# Altium PCB Main.PcbDoc
Units mm, origin at the board's own origin, x right, y up, seen from the top; angles counter-clockwise.
Board outline 52.2 x 24.13 mm, 2 copper layers (Top Layer, Bottom Layer); 22 components, 41 nets, 134 pads, 21 vias.
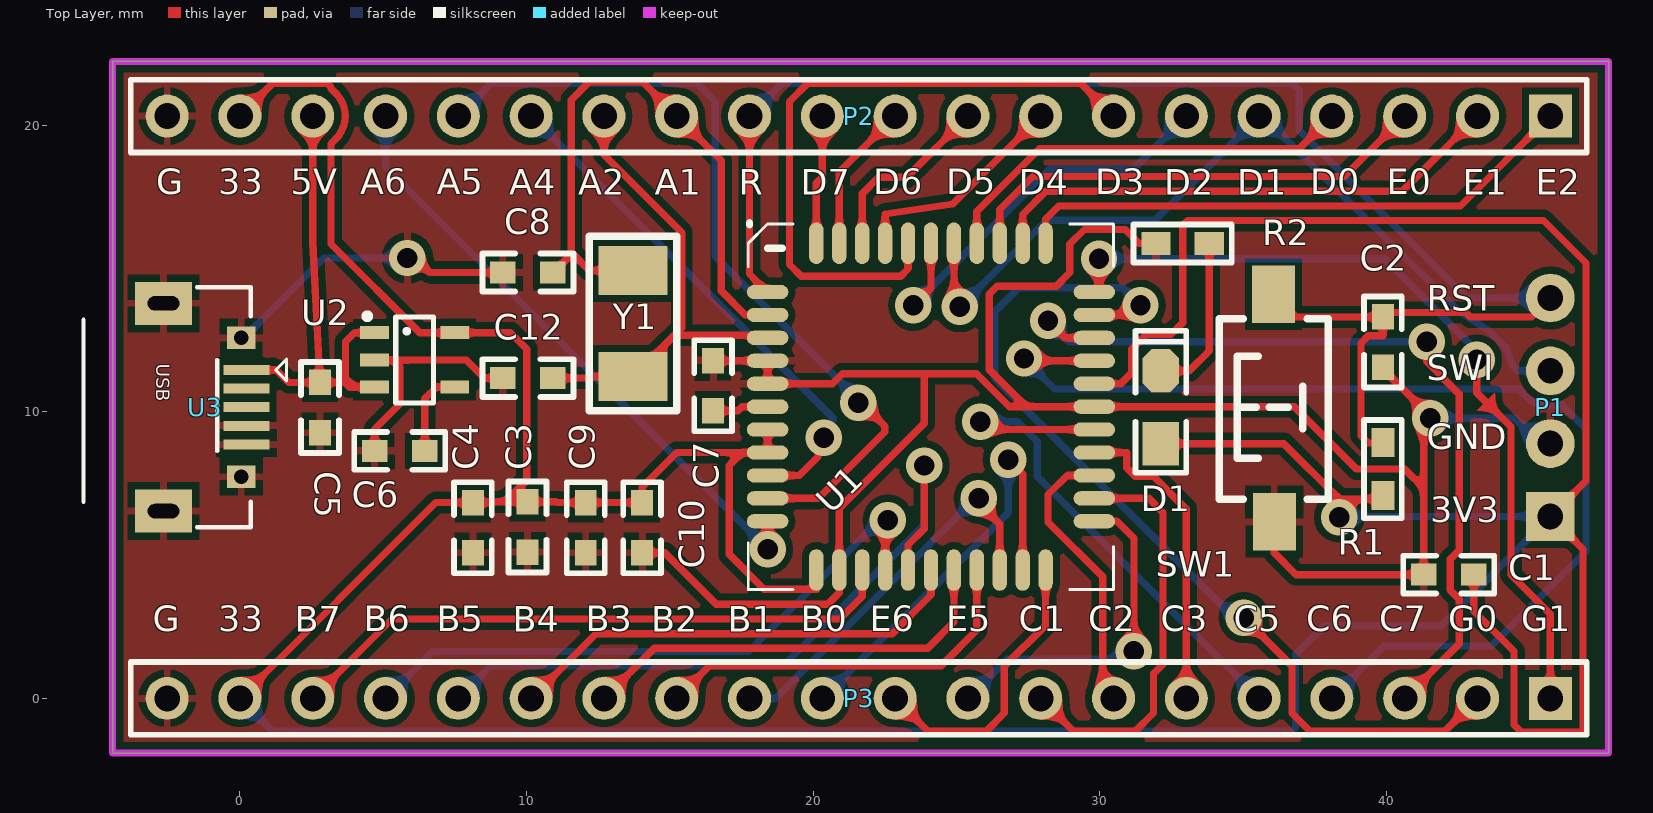
[diagram p0: Top Layer view]
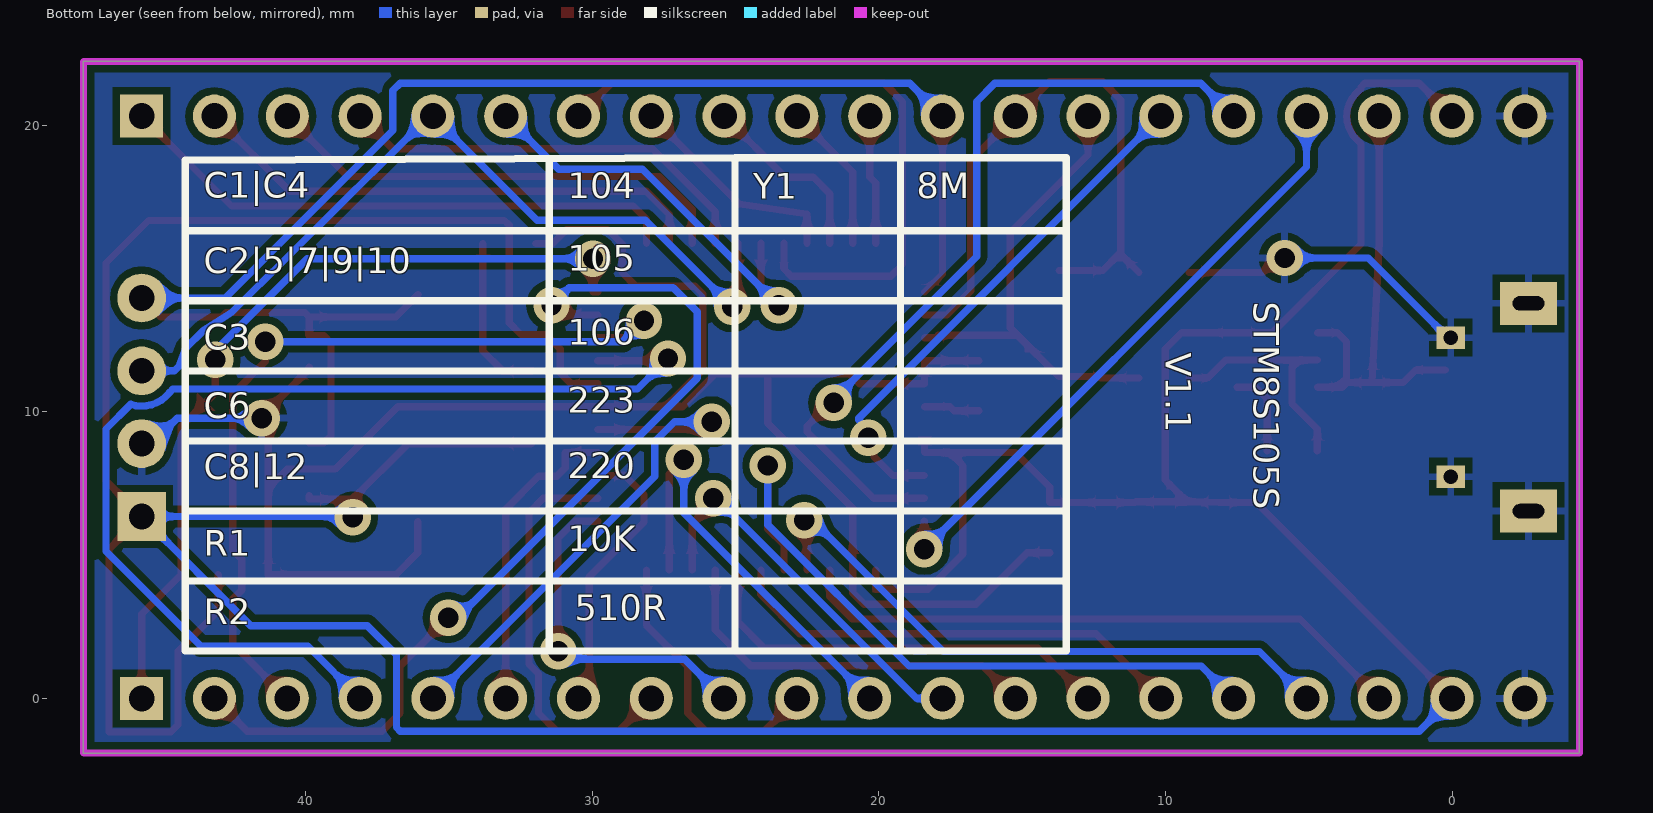
[diagram p1: Bottom Layer view, seen from below]

## Layer stack, top to bottom
Top Solder: solder mask 0.0102, Solder Resist, Dk 3.5
Top Layer: signal copper 0.0356
Dielectric 1: dielectric 0.32, FR-4, Dk 4.8
Bottom Layer: signal copper 0.0356
Bottom Solder: solder mask 0.0102, Solder Resist, Dk 3.5

## Board outline
-4.445,-1.905 -4.445,22.225 47.752,22.225 47.752,-1.905

## Design rules (kind name [scope] priority, off if disabled: settings)
Clearance [All] p1: gap=0.254 ignorepadtopadclearanceinfootprint=FALSE
MinimumSolderMaskSliver [All] p1: minsoldermaskwidth=0.06
PolygonConnect [All] p1: connectstyle=Relief reliefconductorwidth=0.254 reliefentries=4 polygonreliefangle="90 Angle" airgapwidth=0.254
RoutingVias [All] p1: holewidth=0.711 width=1.27 viastyle="Through Hole" minholewidth=0.711 minwidth=1.27 maxholewidth=0.711 maxwidth=1.27
SilkToSilkClearance [All] p1: silktosilkclearance=0.2
SilkToSolderMaskClearance [IsPad] p1: minsilkscreentomaskgap=0.09 clearancetoexposedcopper=TRUE
SolderMaskExpansion [All] p1: expansion=0.102 istentingtop=FALSE
Width [All] p1: maxlimit=0.254 minlimit=0.254 preferedwidth=0.254
27 further rules are at their usual default settings.

## Components (designator, comment, footprint, x,y, rotation, side; value= is the part's Value field where it differs from the comment)
C1 "104,0603" "C 0603" 42.164,4.318 r180 top value=104
C2 "105,0603" "C 0603" 39.878,12.446 r90 top value=104
C3 "106,0603" "C 0603" 10.033,5.969 r270 top value=104
C4 "104,0603" "C 0603" 8.128,5.969 r90 top value=104
C5 "105,0603" "C 0603" 2.794,10.16 r90 top value=104
C6 "223,0603" "C 0603" 5.588,8.636 r0 top value=104
C7 "105,0603" "C 0603" 16.51,10.922 r90 top value=104
C8 "220,0603" "C 0603" 10.033,14.859 r180 top value=104
C9 "105,0603" "C 0603" 12.065,5.969 r90 top value=104
C10 "105,0603" "C 0603" 14.034,5.969 r90 top value=104
C12 "220,0603" "C 0603" 10.033,11.176 r180 top value=104
D1 "LED" "LED 0805G" 32.131,10.16 r90 top
P1 "SWD" HDR-1X4_H 45.72,10.16 r90 top
P2 "Header 20" HDR1X20 45.72,20.32 r180 top
P3 "Header 20" HDR1X20 45.72,0 r180 top
R1 "10K,0603" "R 0603" 39.878,8.001 r270 top
R2 "510R,0603" "R 0603" 32.893,15.875 r180 top
SW1 "SW-PB_V" "TSW SMD-3*6*2.5" 36.068,10.16 r90 top
U1 "STM8S105S" LQFP44 24.13,10.16 r0 top
U2 "RT9193" SOT23-5L 6.096,11.811 r270 top
U3 "USB-mrico" USB-micro_B -2.667,10.16 r270 top
Y1 "8M" XTAL-5032 13.716,13.081 r90 top

## Footprints (in the part's own frame and the unit in brackets; to place one, negate y for a bottom-side part, rotate by r counter-clockwise, add the part's x,y. Pads: shape width x height; smd on the part's side, far side on the other; paste and mask are expansions set on the pad)
"C 0603" [mil] "无极性贴片电容"
  rect 35x30 smd: 1(-35,0) 2(34,0)
  silkscreen extent -63,-26 62,26, body extent -31,-16 31,16, height 32
HDR1X20 [mm] "Connector; Header; 20 Position"
  rect 1.5x1.5 hole 0.9: 1(0,0)
  round 1.5 hole 0.9: 2(2.54,0) 3(5.08,0) 4(7.62,0) 5(10.16,0) 6(12.7,0) 7(15.24,0) 8(17.78,0) 9(20.32,0) 10(22.86,0) 11(25.4,0) 12(27.94,0) 13(30.48,0) 14(33.02,0) 15(35.56,0) 16(38.1,0) 17(40.64,0) 18(43.18,0) 19(45.72,0) 20(48.26,0)
  silkscreen extent -1.27,-1.27 49.53,1.27
HDR-1X4_H [mm] "弯脚排针，4脚"
  rect 1.7x1.7 hole 0.9: 1(-3.81,0)
  round 1.7 hole 0.9: 2(-1.27,0) 3(1.27,0) 4(3.81,0)
  body extent -5.08,-7.77 5.08,1.27, height 4.85
"LED 0805G" [mil] "绿色0805LED"
  rect 60x50 smd: 1(-50,0)
  oct 60x50 smd: 2(50,0)
  silkscreen extent -90,-35 105,35, body extent -39,-25 39,25, height 32
LQFP44 [mm]
  oval 1.45x0.5 smd: 1(-5.72,4.02) 2(-5.72,3.22) 3(-5.72,2.42) 4(-5.72,1.62) 5(-5.72,0.82) 6(-5.72,0.02) 7(-5.72,-0.78) 8(-5.72,-1.58) 9(-5.72,-2.38) 10(-5.72,-3.18) 11(-5.72,-3.98) 23(5.68,-3.98) 24(5.68,-3.18) 25(5.68,-2.38) 26(5.68,-1.58) 27(5.68,-0.78) 28(5.68,0.02) 29(5.68,0.82) 30(5.68,1.62) 31(5.68,2.42) 32(5.68,3.22) 33(5.68,4.02)
  oval 0.5x1.45 smd: 12(-4.02,-5.68) 13(-3.22,-5.68) 14(-2.42,-5.68) 15(-1.62,-5.68) 16(-0.82,-5.68) 17(-0.02,-5.68) 18(0.78,-5.68) 19(1.58,-5.68) 20(2.38,-5.68) 21(3.18,-5.68) 22(3.98,-5.68) 34(3.98,5.72) 35(3.18,5.72) 36(2.38,5.72) 37(1.58,5.72) 38(0.78,5.72) 39(-0.02,5.72) 40(-0.82,5.72) 41(-1.62,5.72) 42(-2.42,5.72) 43(-3.22,5.72) 44(-4.02,5.72)
  silkscreen extent -6.4,-6.35 6.36,6.43
"R 0603" [mil] "1/10W贴片电阻"
  rect 40x31.5 smd: 1(-36.5,0) 2(36.5,0)
  silkscreen extent -68,-26 68,26, body extent -31,-16 31,16, height 16
SOT23-5L [mm] "3x1.6x1.1mm(长宽高)"
  rect 0.45x1 smd: 1(-0.95,-1.4) 2(0,-1.4) 3(0.95,-1.4) 4(0.95,1.4) 5(-0.95,1.4)
  silkscreen extent -1.6,-1.73 1.5,0.66, body extent -1.5,-1.4 1.5,1.4, height 1.15
"TSW SMD-3*6*2.5" [mm] "3*6*2.5mm"
  rect 2x1.5 smd: 1(-3.996,-0.02) 2(3.937,0)
  silkscreen extent -3.21,-1.9 3.09,1.9, body extent -4,-1.88 4,1.62, height 2.59
USB-micro_B [mm] "micro型USB ，5.7*7.8*2.5mm"
  rect 0.35x1.6 smd: 1(-1.3,2.9) 2(-0.65,2.9) 3(0,2.9) 4(0.65,2.9) 5(1.3,2.9)
  rect 1.5x2 hole 0.5 slot 1.1 at 90 deg: 5(-3.625,0) 5(3.625,0)
  rect 0.8x1 hole 0.5: 5(-2.425,2.71) 5(2.425,2.71)
  silkscreen extent -4.19,-2.79 4.19,4.3, body extent -4,-2.71 4,2.89, height 2.8
XTAL-5032 [mm]
  rect 1.7x2.4 smd: 1(-1.85,0) 2(1.85,0)
  silkscreen extent -3.05,-1.52 3.05,1.52

## Part data
C1 C2 C3 C4 C5 C6 C7 C8 C9 C10 C12: library part Cap, "Capacitor", LatestRevisionDate=17-Jul-2002, LatestRevisionNote="Re-released for DXP Platform.", Published=8-Jun-2000, Publisher="Altium Limited"
P1: library part "Header 4", "Header, 4-Pin", LatestRevisionDate=17-Jul-2002, LatestRevisionNote="Re-released for DXP Platform.", Publisher="Altium Limited"
P2 P3: "Header, 20-Pin", LatestRevisionDate=17-Jul-2002, LatestRevisionNote="Re-released for DXP Platform.", Publisher="Altium Limited"
R1 R2: library part Res2, "Resistor", LatestRevisionDate=17-Jul-2002, LatestRevisionNote="Re-released for DXP Platform.", Published=8-Jun-2000, Publisher="Altium Limited"
SW1: "SWITCH"
U1: library part STM8S105S4
U2: library part RT9193X_5P, ICA_MFR_NAME=RICHTEK, ICA_PARTNUM=$$2191094$$RT9193-15CU5, Part Number=TMP-13
U3: library part usb-STM
Y1: library part XTAL, "Crystal Oscillator", LatestRevisionDate=17-Jul-2002, LatestRevisionNote="Re-released for DXP Platform.", Published=8-Jun-2000, Publisher="Altium Limited"

## Via types
v1: diameter 1.27, hole 0.711, Top Layer to Bottom Layer, 21 vias

## Nets (pads, with @x,y where several pads share a name; then routed paths per layer and width w, separated by ;. In a path a pad name is that pad's centre, name@x,y a point inside that pad or via, vN(x,y) a via of type N, cw(c..) or ccw(c..) an arc to the next point about the centre after c; other vN are vias at no path point)
5V: C5.2 P2.18 U2.1 U2.3 U3.1 | length 16.9
  Top Layer w0.254: U3.1 1.27,11.46 1.706,11.024 C5.2 ; P2.18 2.54,15.926 C5.2 ; U2.3 3.998,10.861 ; U2.1 3.998,12.761 3.683,12.446 3.683,11.176 3.998,10.861 ; C5.2 3.658,11.024 3.82,10.861 3.998,10.861
GND: C1.2 C2.1 C3.2 C4.1 C5.1 C6.1 C7.2 C8.2 C9.1 C10.1 C12.2 P1.2 P2.20 P3.20 R2.2 SW1.1 U1.4 U1.5 U1.13 U1.28 U2.2 U3.4 U3.5 | length 93.8
  Top Layer w0.254: U2.2 5.334,11.811 ; C6.1 4.699,9.398 5.588,10.287 5.588,11.557 5.334,11.811 ; v1(5.842,15.367) 6.117,15.367 6.625,14.859 C8.2 ; C12.2 8.534,11.176 7.899,11.811 5.334,11.811 ; C10.1 14.822,5.08 16.615,3.287 20.508,3.287 20.91,3.689 U1.13 20.91,6.639 23.876,9.605 23.876,11.176 ; C7.2 16.516,11.78 U1.4 U1.5 20.676,10.98 21.024,11.328 25.699,11.328 26.848,10.18 27.432,10.18 ; R2.2 31.373,15.875 30.888,16.36 29.464,16.36 28.956,15.852 28.956,14.859 28.48,14.383 26.416,14.383 26.142,14.109 26.142,11.47 27.432,10.18 ; SW1.1 36.088,5.08 36.85,4.318 C1.2 41.3,7.341 ; C2.1 39.878,11.493 41.3,10.071 41.3,7.341 ; 27.432,10.18 U1.28 36.785,10.18 38.964,8.001 40.64,8.001 41.3,7.341
  Bottom Layer w0.254: U3.5@0.043,12.585 0.143,12.585 2.925,15.367 v1(5.842,15.367) ; v1(41.529,9.779) 44.479,9.779 45.368,8.89 P1.2
NetC6_2: C6.2 U2.4 | length 3
  Top Layer w0.254: C6.2 6.452,10.455 6.858,10.861 U2.4
NetC7_1: C7.1 U1.6 | length 2
  Top Layer w0.254: C7.1 17.374,10.033 17.521,10.18 U1.6
NetD1_2: D1.2 R2.1 | length 5.7
  Top Layer w0.254: D1.2 33.126,11.43 33.82,12.124 R2.1
OSCIN/PA1: C8.1 P2.13 U1.2 Y1.2 | length 21.8
  Top Layer w0.254: C8.1 11.593,15.53 ; Y1.2 12.192,14.931 11.593,15.53 ; U1.2 17.633,13.38 16.789,14.224 16.789,18.771 P2.13 14.046,21.514 12.192,21.514 11.557,20.879 11.557,15.566 11.593,15.53
OSCOUT/PA2: C12.1 P2.14 U1.3 Y1.1 | length 19.1
  Top Layer w0.254: C12.1 12.268,11.176 12.323,11.231 Y1.1 ; P2.14 12.7,18.974 15.418,16.256 15.418,12.933 Y1.1 ; U1.3 17.932,12.58 17.932,12.675 15.168,12.675 13.724,11.231 Y1.1
PA4: P2.15 U1.9 | length 18.5
  Top Layer w0.254: U1.9 19.516,7.78 20.169,8.433 20.169,8.906 v1(20.364,9.1)
  Bottom Layer w0.254: P2.15 20.701,9.779 20.701,9.713 20.364,9.375 v1(20.364,9.1)
PA5: P2.16 U1.10 | length 28.8
  Top Layer w0.254: U1.10 20.188,6.98 22.501,9.293 22.501,9.503 21.692,10.312 v1(21.576,10.312)
  Bottom Layer w0.254: P2.16 8.763,21.463 15.951,21.463 16.586,20.828 16.586,15.418 21.576,10.428 v1(21.576,10.312)
PA6: P2.17 U1.11 | length 21.6
  Top Layer w0.254: U1.11 18.415,6.18 v1(18.415,5.207)
  Bottom Layer w0.254: P2.17 5.08,18.542 v1(18.415,5.207)
PB0: P3.11 U1.21 | length 15.1
  Top Layer w0.254: v1(26.802,8.331) 27.31,7.823 U1.21
  Bottom Layer w0.254: P3.11 26.802,6.482 v1(26.802,8.331)
PB1: P3.12 U1.20 | length 13.7
  Top Layer w0.254: v1(25.781,6.985) 25.781,6.807 26.51,6.078 U1.20
  Bottom Layer w0.254: P3.12 18.681,0 25.666,6.985 v1(25.781,6.985)
PB2: P3.13 U1.19 | length 13.6
  Top Layer w0.254: P3.13 16.383,1.143 24.465,1.143 25.71,2.388 U1.19
PB3: P3.14 U1.18 | length 15.1
  Top Layer w0.254: P3.14 14.453,1.753 23.996,1.753 24.91,2.667 U1.18
PB4: P3.15 U1.17 | length 16.3
  Top Layer w0.254: P3.15 12.421,2.261 22.764,2.261 24.11,3.607 U1.17
PB5: P3.16 U1.16 | length 24.7
  Top Layer w0.254: U1.16 23.31,5.352 23.876,5.918 v1(23.876,8.128)
  Bottom Layer w0.254: P3.16 8.751,1.131 18.951,1.131 23.876,6.056 v1(23.876,8.128)
PB6: P3.17 U1.15 | length 22
  Top Layer w0.254: U1.15 22.51,5.735 22.733,5.958 22.606,6.085 v1(22.606,6.223)
  Bottom Layer w0.254: P3.17 6.719,1.639 17.743,1.639 22.327,6.223 v1(22.606,6.223)
PB7: P3.18 U1.14 | length 21.6
  Top Layer w0.254: P3.18 5.309,2.769 20.923,2.769 21.71,3.556 U1.14
PC1: P3.8 U1.24 | length 14.4
  Top Layer w0.254: P3.8 29.083,-1.143 31.242,-1.143 31.877,-0.508 31.877,0.864 32.207,1.194 32.207,6.477 31.704,6.98 U1.24
PC2: P3.7 U1.25 | length 10.2
  Top Layer w0.254: U1.25 28.862,7.78 28.194,7.112 28.194,6.147 30.099,4.242 30.099,0.635 30.48,0.635 P3.7
PC3: P3.6 U1.26 | length 10.9
  Top Layer w0.254: U1.26 30.937,8.58 30.937,8.052 31.242,7.747 31.877,7.747 33.02,6.604 P3.6
PC5: P3.5 U1.27 | length 18.5
  Top Layer w0.254: v1(25.832,9.652) 26.104,9.38 U1.27
  Bottom Layer w0.254: v1(25.832,9.652) 27.127,9.652 27.818,8.961 27.818,7.742 P3.5
PC6: P3.4 U1.30 | length 38.4
  Top Layer w0.254: v1(27.356,11.862) 27.438,11.78 U1.30
  Bottom Layer w0.254: v1(27.356,11.862) 28.348,10.869 28.423,10.795 44.634,10.795 44.718,10.711 44.765,10.654 ccw(c45.72,11.43) 46.103,10.26 46.965,9.398 46.965,5.131 43.663,1.829 39.929,1.829 P3.4
PC7: P3.3 U1.31 | length 29.4
  Top Layer w0.254: v1(28.194,13.183) 28.797,12.58 U1.31 ; P3.3 42.545,1.905 42.545,3.462 42.228,3.779 42.228,4.857 42.545,5.174 42.545,10.617 41.402,11.76 v1(41.402,12.446)
  Bottom Layer w0.254: v1(28.194,13.183) 28.931,12.446 v1(41.402,12.446)
PD0: P2.4 U1.37 | length 14.9
  Top Layer w0.254: U1.37 25.71,16.993 27.894,19.177 36.957,19.177 P2.4
PD2: P2.6 U1.39 | length 14.7
  Top Layer w0.254: v1(23.495,13.716) 24.11,14.331 U1.39
  Bottom Layer w0.254: v1(23.495,13.716) 28.245,18.466 31.166,18.466 P2.6
PD3: P2.7 U1.40 | length 23
  Top Layer w0.254: U1.40 23.31,14.986 23.056,14.732 19.583,14.732 19.177,15.138 19.177,20.828 19.812,21.463 29.337,21.463 P2.7
PD4: P2.8 U1.41 | length 7.7
  Top Layer w0.254: U1.41 22.51,16.899 24.869,17.249 P2.8
PD5: P2.9 U1.42 | length 6.5
  Top Layer w0.254: U1.42 21.71,17.613 22.281,18.184 23.264,18.184 P2.9
PD6: P2.10 U1.43 | length 5.2
  Top Layer w0.254: U1.43 20.91,18.37 P2.10
PD7: P2.11 U1.44 | length 4.5
  Top Layer w0.254: U1.44 20.11,17.983 20.32,18.193 P2.11
PE0: P2.3 U1.36 | length 16.7
  Top Layer w0.254: U1.36 26.51,17.061 27.661,18.212 38.532,18.212 P2.3
PE1: P2.2 U1.35 | length 18.3
  Top Layer w0.254: U1.35 27.31,16.884 28.117,17.691 40.551,17.691 P2.2
PE2: P2.1 U1.34 | length 19.9
  Top Layer w0.254: U1.34 28.11,16.726 28.567,17.183 42.583,17.183 P2.1
PE5: P3.9 U1.23 | length 12
  Top Layer w0.254: U1.23 30.599,6.18 31.191,5.588 v1(31.191,1.651)
  Bottom Layer w0.254: P3.9 26.772,1.372 30.912,1.372 v1(31.191,1.651)
PE6: P3.10 U1.22 | length 10.1
  Top Layer w0.254: P3.10 24.003,-1.143 26.035,-1.143 26.67,-0.508 26.67,1.118 28.11,2.558 U1.22
PG0: P3.2 U1.32 | length 33.1
  Top Layer w0.254: U1.32 31.084,13.38 v1(31.42,13.716) ; v1(35.027,2.819) 36.703,1.143 36.703,-0.508 37.338,-1.143 42.037,-1.143 P3.2
  Bottom Layer w0.254: v1(31.42,13.716) 30.81,14.326 27.178,14.326 26.34,13.487 26.34,11.176 34.696,2.819 v1(35.027,2.819)
PG1: P3.1 U1.33 | length 29
  Top Layer w0.254: U1.33 29.972,14.18 v1(29.972,15.342) ; v1(43.155,11.811) 43.155,10.668 44.348,9.474 44.348,4.318 45.72,2.946 P3.1
  Bottom Layer w0.254: v1(29.972,15.342) 39.943,15.342 42.979,12.306 43.053,12.232 v1(43.155,11.811)
RESET: C2.2 P1.4 P2.12 R1.1 SW1.2 U1.1 | length 54.7
  Top Layer w0.254: P2.12 17.78,14.81 U1.1 ; SW1.2 36.855,13.31 C2.2 ; R1.1 39.878,8.915 39.37,8.915 39.116,9.169 39.116,12.395 39.37,12.649 39.878,12.649 C2.2 ; P1.4 45.06,13.31 42.926,13.31 42.774,13.462 40.03,13.462 C2.2
  Bottom Layer w0.254: P2.12 18.923,21.463 36.703,21.463 36.957,21.209 36.957,19.812 42.799,13.97 P1.4
SWIM/PD1: P1.3 P2.5 U1.38 | length 29.4
  Top Layer w0.254: U1.38 24.91,13.876 v1(25.121,13.665)
  Bottom Layer w0.254: v1(25.121,13.665) 28.143,16.688 31.928,16.688 P2.5 35.683,20.32 36.73,19.273 42.589,13.462 43.575,12.827 44.171,12.232 44.424,11.579 44.573,11.43 44.678,11.43 P1.3
VCC3V3: C1.1 C3.1 C4.2 C9.2 C10.2 D1.1 P1.1 P2.19 P3.19 R1.2 U1.7 U1.8 U1.12 U1.29 U2.5 | length 170.1
  Top Layer w0.254: P3.19 6.833,6.833 C4.2 9.246,6.858 ; P2.19 1.143,21.463 3.048,21.463 3.175,21.336 3.175,21.276 3.244,21.207 3.253,21.198 cw(c2.54,20.32) 3.446,19.643 3.446,19.627 3.346,19.527 cw(c2.54,20.32) 3.335,19.516 ccw(c3.514,19.335) 3.332,19.513 3.269,19.448 3.175,19.341 3.175,15.86 3.249,15.785 6.274,12.761 U2.5 9.439,12.761 10.008,12.192 10.008,7.62 9.246,6.858 ; 18.41,8.966 U1.8 17.521,8.58 ; U1.12 20.11,3.81 18.288,3.81 17.069,5.029 17.069,8.128 17.521,8.58 ; U1.29 30.734,10.98 31.115,11.361 31.115,12.192 31.623,12.7 32.487,12.7 32.893,13.106 32.893,16.51 33.058,16.675 45.479,16.675 46.965,15.189 46.965,7.595 P1.1 46.863,5.207 46.863,-1.168 44.704,-1.168 44.45,-0.914 44.45,1.651 43.053,3.048 C1.1 ; D1.1 36.424,8.89 38.354,6.96 38.989,6.96 ; v1(38.354,6.325) 38.989,6.96 ; R1.2 39.878,6.96 38.989,6.96 ; 9.246,6.858 C3.1 11.024,6.858 11.049,6.833 C9.2 C10.2 14.034,7.374 15.24,8.58 17.521,8.58
  Bottom Layer w0.254: P3.19 1.143,-1.143 36.703,-1.143 36.83,-1.016 36.83,1.524 37.846,2.54 41.91,2.54 P1.1 38.379,6.35 v1(38.354,6.325)
pads on no net: U3.2 U3.3

## Polygon pours and split planes (outlines as drawn)
GND on Top Layer "GND_L01_P002" (solid, pour order 2): -4.445,-1.905 -4.445,22.225 47.752,22.225 47.752,-1.905
GND on Bottom Layer "GND_L02_P003" (solid, pour order 3): -4.445,-1.905 -4.445,22.225 47.752,22.225 47.752,-1.905

## Keep-outs
Keep-Out Layer:
  the board outline again, w0.254

## Silkscreen, mask and mechanical layers (free items; w line width, h text height)
Top Overlay:
  text "G" at -2.921,17.288 h1.52
  text "33" at -0.762,17.288 h1.52
  text "5V" at 1.778,17.288 h1.52
  text "A6" at 4.191,17.288 h1.52
  text "A5" at 6.858,17.288 h1.52
  text "D6" at 22.098,17.288 h1.52
  text "D5" at 24.638,17.288 h1.52
  text "D3" at 29.845,17.288 h1.52
  text "D0" at 37.338,17.288 h1.52
  text "E0" at 40.005,17.288 h1.52
  text "A4" at 9.398,17.272 h1.52
  text "A2" at 11.811,17.272 h1.52
  text "A1" at 14.478,17.272 h1.52
  text "R" at 17.399,17.272 h1.52
  text "D7" at 19.558,17.272 h1.52
  text "D4" at 27.178,17.272 h1.52
  text "D2" at 32.258,17.272 h1.52
  text "D1" at 34.798,17.272 h1.52
  text "E1" at 42.672,17.272 h1.52
  text "E2" at 45.212,17.272 h1.52
  text "RST" at 41.402,13.224 h1.52
  text "SWI" at 41.402,10.811 h1.52
  text "GND" at 41.402,8.398 h1.52
  text "3V3" at 41.529,5.858 h1.52
  text "G" at -3.048,2.048 h1.52
  text "33" at -0.762,2.048 h1.52
  text "B6" at 4.318,2.048 h1.52
  text "B5" at 6.858,2.048 h1.52
  text "B3" at 12.065,2.048 h1.52
  text "B0" at 19.558,2.048 h1.52
  text "E6" at 21.971,2.048 h1.52
  text "E5" at 24.638,2.048 h1.52
  text "C1" at 27.178,2.048 h1.52
  text "C2" at 29.591,2.048 h1.52
  text "C3" at 32.131,2.048 h1.52
  text "C5" at 34.671,2.048 h1.52
  text "C6" at 37.211,2.048 h1.52
  text "C7" at 39.751,2.048 h1.52
  text "G0" at 42.164,2.048 h1.52
  text "G1" at 44.704,2.048 h1.52
  text "B7" at 1.905,2.032 h1.52
  text "B4" at 9.525,2.032 h1.52
  text "B2" at 14.351,2.032 h1.52
  text "B1" at 17.018,2.032 h1.52
Bottom Overlay:
  lines w0.254: 13.462,4.095 44.196,4.095 ; 13.462,6.539 44.196,6.539 ; 13.462,8.983 44.196,8.983 ; 13.462,11.427 44.196,11.427 ; 13.462,13.871 44.196,13.871 ; 13.462,16.316 44.196,16.316 ; 13.462,18.862 13.462,1.651 25.019,1.651 ; 13.528,18.862 25.019,18.862 ; 19.241,1.651 19.241,18.862 ; 31.496,1.651 31.496,18.796 ; 25.019,1.651 25.019,18.862 ; 25.019,1.651 44.196,1.651 44.196,18.78 25.019,18.862
  text "8M" at 18.669,17.161 h1.52
  text "104" at 30.861,17.161 h1.52
  text "C1|C4" at 43.561,17.178 h1.52
  text "Y1" at 24.383,17.145 h1.52
  text "105" at 30.861,14.621 h1.52
  text "C2|5|7|9|10" at 43.561,14.532 h1.52
  text "STM8S105S" at 7.223,13.843 h1.52 r90
  text "V1.1" at 10.287,12.064 h1.52 r90
  text "106" at 30.861,12.039 h1.52
  text "C3" at 43.561,11.87 h1.52
  text "223" at 30.862,9.668 h1.52
  text "C6" at 43.561,9.478 h1.52
  text "220" at 30.862,7.382 h1.52
  text "C8|12" at 43.561,7.356 h1.52
  text "10K" at 30.861,4.842 h1.52
  text "R1" at 43.561,4.678 h1.52
  text "510R" at 30.607,2.429 h1.52
  text "R2" at 43.561,2.286 h1.52
Bottom Solder:
  text "sTeeLM" at 4.318,13.716 h1.52 r90

## Text inside footprints (layer, text, board x,y; h text height)
U3: Top Overlay "USB" at -3.069,11.684 h0.81 r270